# Altium PCB OSSI-1 Beacon.PcbDoc
Units mil, origin at the board's own origin, x right, y up, seen from the top; angles counter-clockwise.
Board outline 3623 x 3623 mil, 2 copper layers (Top, Bottom), stack 61.811 mil thick; 116 components, 120 nets, 377 pads, 258 vias.
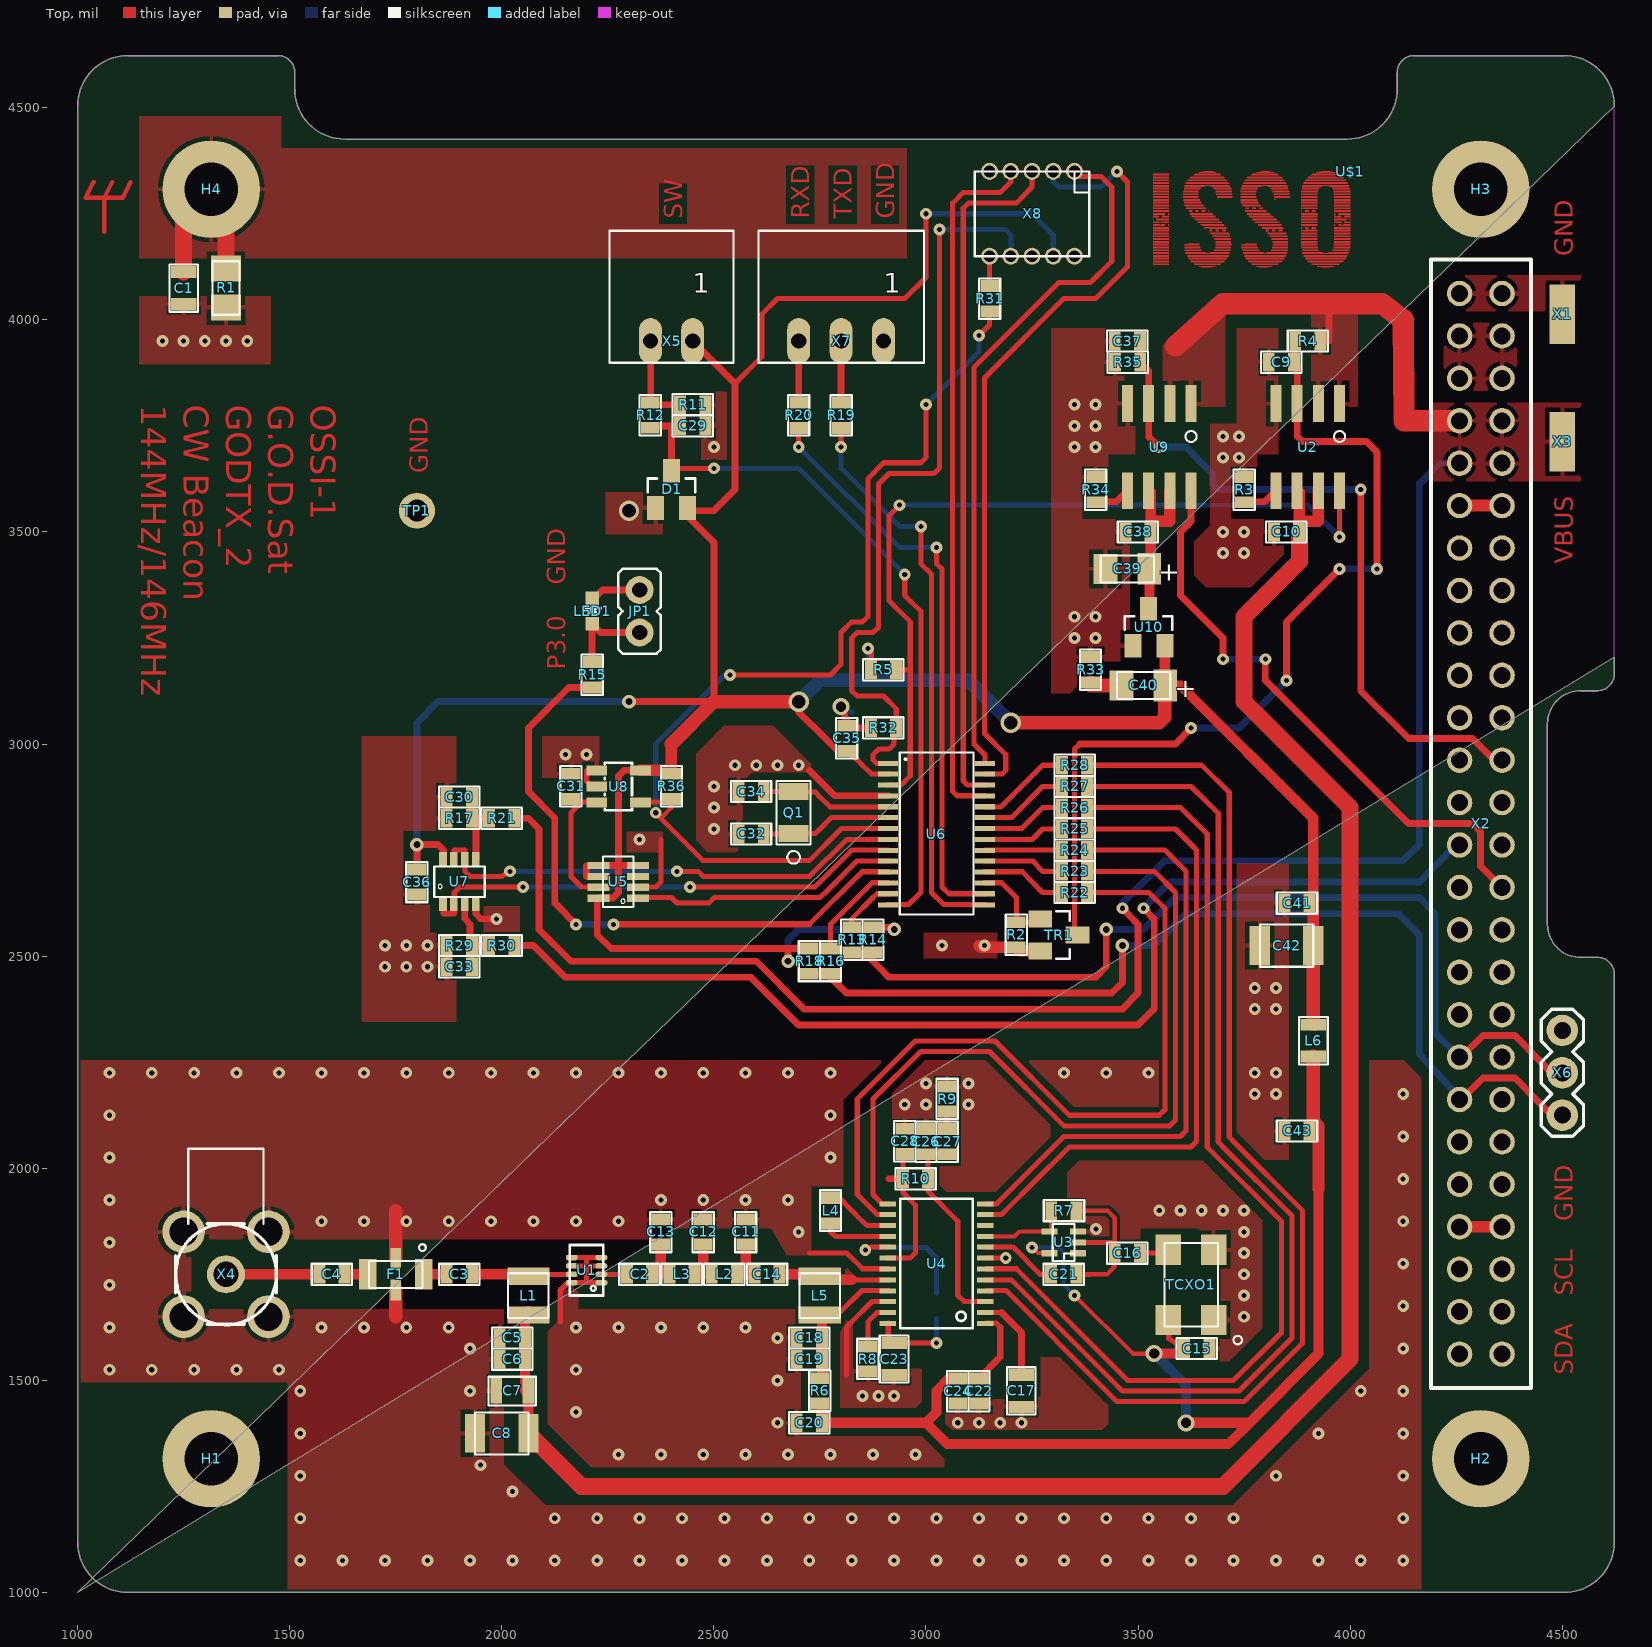
[diagram p0: Top view]
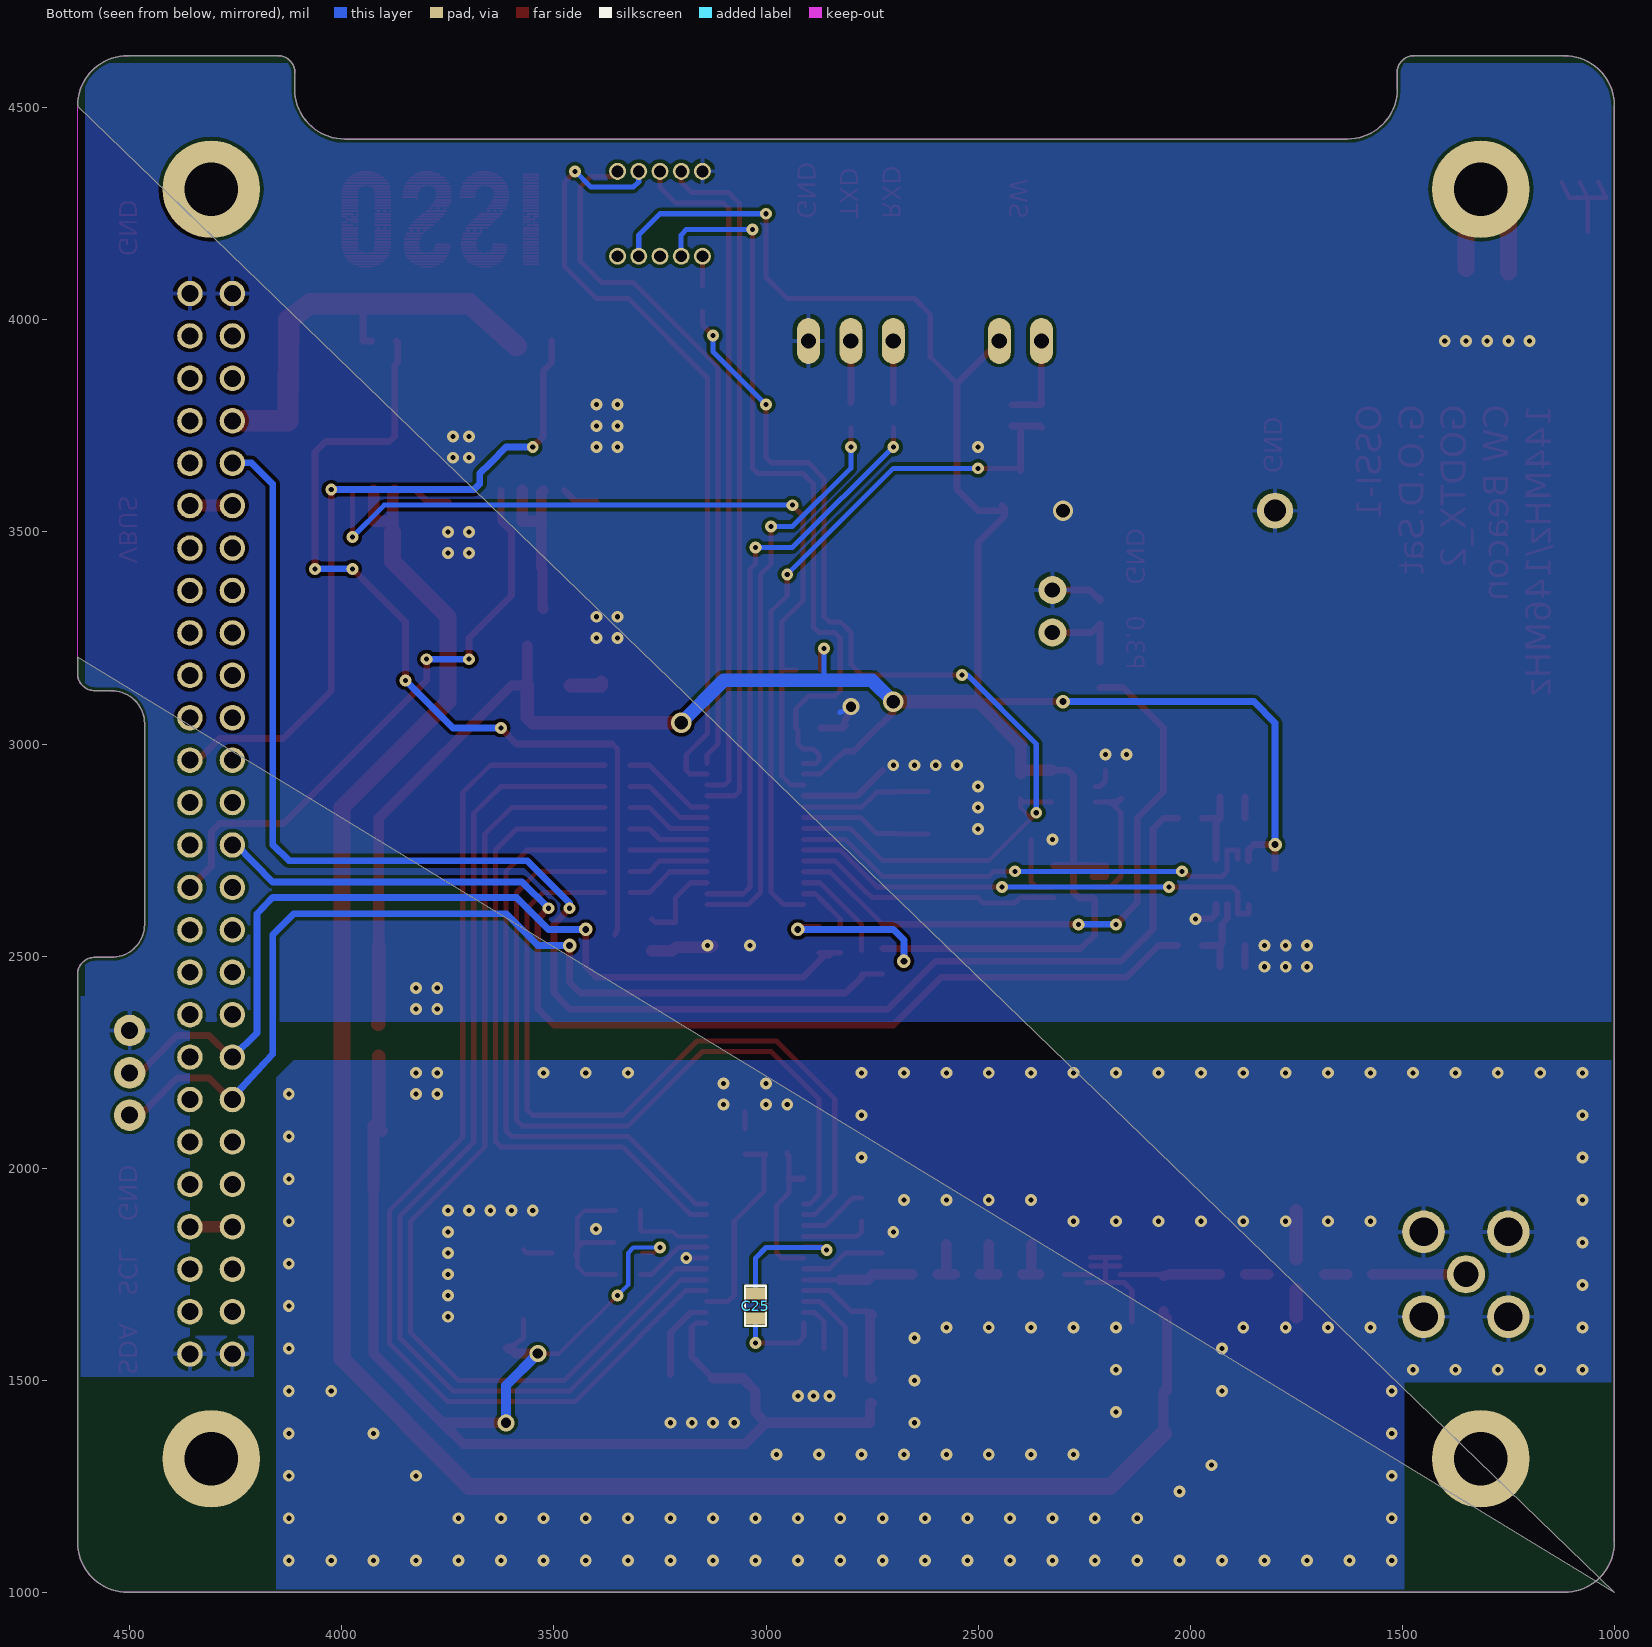
[diagram p1: Bottom view, seen from below]

## Layer stack, top to bottom
Top Solder: solder mask 0.4, Solder Resist, Dk 3.5
Top: signal copper 1.378
Dielectric 1: core 59.0551, FR-4, Dk 4.8
Bottom: signal copper 1.378
Bottom Solder: solder mask 0.4, Solder Resist, Dk 3.5

## Board outline
4623,4504 ccw(c4504,4504) 4504,4623 4150,4623 ccw(c4150.5,4583.5) 4111,4583 4111,4544 cw(c3993,4544) 3993,4426 1630,4426 cw(c1630,4544) 1512,4544 1512,4583 ccw(c1472.5,4583.5) 1473,4623 1119,4623 ccw(c1119,4504) 1000,4504 1000,1119 ccw(c1119,1119) 1119,1000 4504,1000 ccw(c4504,1119) 4623,1119 4623,2418 4623,2457 ccw(c4583,2457) 4583,2497 4544,2497 cw(c4543.5,2575.5) 4465,2575 4465,3048 cw(c4543.5,3047.5) 4544,3126 4583,3126 ccw(c4583,3166) 4623,3166 4623,3205 1000,1000

## Design rules (kind name [scope] priority, off if disabled: settings)
Clearance mdViaVia [IsVia vs IsVia] p1: gap=8
Clearance mdPadVia [IsPad vs IsVia] p2: gap=8
Clearance mdPadPad [IsPad vs IsPad] p3: gap=8
Clearance mdWireVia [(InLayerClass('Signal Layers') AND IsTrack) vs IsVia] p4: gap=8
Clearance mdWirePad [(InLayerClass('Signal Layers') AND IsTrack) vs IsPad] p5: gap=8
Clearance mdWireWire [(InLayerClass('Signal Layers') AND IsTrack) vs (InLayerClass('Signal Layers') AND IsTrack)] p6: gap=8
Clearance [All] p7: gap=8
HoleSize [All] p1: absolutevalues=TRUE maxlimit=100000 minlimit=24 maxpercent=80.000 minpercent=20.000
HoleToHoleClearance [All] p1: gap=8 allowstackedmicrovias=TRUE
PolygonConnect ThermalVias [IsVia] p1: connectstyle=Direct reliefconductorwidth=10 reliefentries=4 polygonreliefangle="90 Angle" airgapwidth=10
PolygonConnect [All] p2: connectstyle=Relief reliefconductorwidth=10 reliefentries=4 polygonreliefangle="90 Angle" airgapwidth=10
RoutingVias [All] p1: holewidth=28 width=50 viastyle="Through Hole" minholewidth=28 minwidth=50 maxholewidth=28 maxwidth=50
SilkToSilkClearance [All] p1 off: silktosilkclearance=10
SilkToSolderMaskClearance [IsPad] p1 off: minsilkscreentomaskgap=10 clearancetoexposedcopper=TRUE
SolderMaskExpansion [All] p1: expansion=4
Width [All] p1: maxlimit=100000 minlimit=10 preferedwidth=10
26 further rules are at their usual default settings.

## Components (designator, comment, footprint, x,y, rotation, side; value= is the part's Value field where it differs from the comment)
C1 "DNP" C0805(2012) 1250,4075 r270 top
C2 "10nF" C0603(1608) 2325,1750 r180 top
C3 "10nF" C0603(1608) 1900,1750 r180 top
C4 "0R" C0603(1608) 1600,1750 r180 top
C5 "10nF" C0603(1608) 2025,1600 r180 top
C6 "100nF" C0603(1608) 2025,1550 r180 top
C7 "1uF,0805" C0805(2012) 2025,1475 r180 top
C8 "22uF,1210" C1210-GCM32 2000,1375 r180 top
C9 "1uF" C0603(1608) 3838,3900 r180 top
C10 "100nF" C0603(1608) 3850,3500 r180 top
C11 "22pF" C0603(1608) 2575,1850 r270 top
C12 "39pF" C0603(1608) 2475,1850 r270 top
C13 "22pF" C0603(1608) 2375,1850 r270 top
C14 "1nF" C0603(1608) 2625,1750 r0 top
C15 "10nF" C0603(1608) 3638,1575 r0 top
C16 "1nF" C0603(1608) 3475,1800 r180 top
C17 "2.2uF, 0805" C0805(2012) 3225,1475 r90 top
C18 "100pF" C0603(1608) 2725,1600 r180 top
C19 "1uF" C0603(1608) 2725,1550 r180 top
C20 "1uF,0603 Too Small!!" C0603(1608) 2725,1400 r180 top
C21 "DNP" C0603(1608) 3325,1750 r180 top
C22 "100pF" C0603(1608) 3125,1475 r270 top
C23 "1uF 0805" C0805(2012) 2925,1550 r90 top
C24 "1uF,0603" C0603(1608) 3075,1475 r270 top
C25 "22nF" C0603(1608) 3025,1675 r90 bottom
C26 "68pF" C0603(1608) 3000,2063 r270 top
C27 "1000pF" C0603(1608) 3050,2063 r270 top
C28 "22pF" C0603(1608) 2950,2063 r90 top
C29 "100nF" C0603(1608) 2450,3750 r0 top
C30 "TBD" C0603(1608) 1900,2875 r180 top
C31 "100nF" C0603(1608) 2163,2900 r90 top
C32 "12.5pF" C0603(1608) 2588,2788 r180 top
C33 "100nF" C0603(1608) 1900,2475 r180 top
C34 "12.5pF" C0603(1608) 2588,2888 r180 top
C35 "100nF" C0603(1608) 2813,3013 r90 top
C36 "100nF" C0603(1608) 1800,2675 r270 top
C37 "1uF" C0603(1608) 3475,3950 r180 top
C38 "100nF" C0603(1608) 3500,3500 r180 top
C39 "10uF, LDO Tantal 16V" C1206(3216)-A 3475,3413 r180 top
C40 "10uF, LDO Tantal 16V" C1206(3216)-A 3513,3138 r180 top
C41 "10nF" C0603(1608) 3875,2625 r180 top
C42 "22uF,1210" C1210-GCM32 3850,2525 r180 top
C43 "100nF" C0603(1608) 3875,2088 r180 top
D1 "BAT54S" SOT23 2400,3600 r0 top
F1 "LFCN-160" LFCN 1750,1750 r180 top
H1 "" 3.2-PAD-ROUND 1315,1315 r0 top
H2 "" 3.2-PAD-ROUND 4308,1315 r0 top
H3 "" 3.2-PAD-ROUND 4308,4308 r0 top
H4 "" 3.2-PAD-ROUND 1315,4308 r0 top
JP1 "" JP1 2325,3313 r180 top
L1 "470nH, 1008 size" L1008(2520) 2063,1700 r180 top
L2 "68nH" L0603(1608) 2525,1750 r180 top
L3 "68nH" L0603(1608) 2425,1750 r180 top
L4 "8.2nH" L0603(1608) 2775,1900 r90 top
L5 "470nH, 1008 size" L1008(2520) 2750,1700 r180 top
L6 "7 R Ferrite Bead, 3A" L0805(2012) 3913,2301 r270 top
LED1 "" LED-0603 2213,3313 r0 top
Q1 "NX-3215" NX-3215 2688,2838 r90 top
R1 "DNP" WSL1206 1350,4075 r90 top
R2 "100k" R0603(1608) 3213,2550 r90 top
R3 "6.2k" R0603(1608) 3750,3600 r270 top
R4 "100k" R0603(1608) 3900,3950 r0 top
R5 "100k" R0603(1608) 2900,3175 r180 top
R6 "0" R0603(1608) 2750,1475 r90 top
R7 "1M" R0603(1608) 3325,1900 r0 top
R8 "3.6k" R0603(1608) 2863,1550 r90 top
R9 "2.4k" R0603(1608) 3050,2163 r90 top
R10 "5.1k" R0603(1608) 2975,1975 r0 top
R11 "47k" R0603(1608) 2450,3800 r0 top
R12 "4.7k" R0603(1608) 2350,3775 r90 top
R13 "250" R0603(1608) 2825,2538 r90 top
R14 "10k" R0603(1608) 2875,2538 r90 top
R15 "1k" R0603(1608) 2213,3163 r90 top
R16 "250" R0603(1608) 2775,2488 r90 top
R17 "100k" R0603(1608) 1900,2825 r180 top
R18 "10k" R0603(1608) 2725,2488 r90 top
R19 "4.7k" R0603(1608) 2800,3775 r270 top
R20 "4.7k" R0603(1608) 2700,3775 r270 top
R21 "100k" R0603(1608) 2000,2825 r180 top
R22 "4.7k" R0603(1608) 3350,2650 r0 top
R23 "4.7k" R0603(1608) 3350,2700 r0 top
R24 "4.7k" R0603(1608) 3350,2750 r0 top
R25 "4.7k" R0603(1608) 3350,2800 r0 top
R26 "4.7k" R0603(1608) 3350,2850 r0 top
R27 "4.7k" R0603(1608) 3350,2900 r0 top
R28 "4.7k" R0603(1608) 3350,2950 r0 top
R29 "DNP" R0603(1608) 1900,2525 r180 top
R30 "10k" R0603(1608) 2000,2525 r180 top
R31 "4.7k" R0603(1608) 3150,4050 r270 top
R32 "100k" R0603(1608) 2900,3038 r180 top
R33 "0" R0603(1608) 3388,3175 r90 top
R34 "23.7k" R0603(1608) 3400,3600 r270 top
R35 "100k" R0603(1608) 3475,3900 r0 top
R36 "100k" R0603(1608) 2400,2900 r90 top
TCXO1 "19.2MHz" TCXO_M532 3625,1725 r90 top
TP1 "TP" TP-13 1800,3550 r0 top
TR1 "FDV301N" SOT23 3313,2550 r270 top
U1 "ADL5530" LFCSP8_CP 2200,1760 r180 top
U2 "MAX890L" SO8 3900,3700 r180 top
U3 "NC7SZ04" SC70-5 3325,1825 r90 top
U4 "ADF7012" TSSOP24 3025,1775 r90 top
U5 "MAX6369" SOT23-8 2275,2675 r90 top
U6 "MSP430F2132" PW28 3025,2788 r270 top
U7 "OPA2347" SOT23-8DCN 1900,2675 r0 top
U8 "TPS3838" SOT23-5DBV 2275,2900 r270 top
U9 "MAX890L" SO8 3550,3700 r180 top
U10 "MCP1700_SOT23" SOT23 3525,3275 r0 top
U$1 "" OSSILOGORECT1005 4000,4350 r180 top
X1 "P-PAD-S" P-PAD-S 4500,4013 r90 top
X2 "ESQ-126-38-G-D" ESQ-126-XX-X-D 4308,2812 r0 top
X3 "P-PAD-S" P-PAD-S 4500,3713 r90 top
X4 "RFCON-MCX-R/A" MCX-R/A 1350,1750 r90 top
X5 "5268-02" 5628-02 2400,3950 r0 top
X6 "" 1X03 4500,2125 r90 top
X7 "5268-03" 5268-03 2800,3950 r0 top
X8 "JTAG10PINMINI-H" M50-3200545 3250,4250 r180 top

## Footprints (in the part's own frame and the unit in brackets; to place one, negate y for a bottom-side part, rotate by r counter-clockwise, add the part's x,y. Pads: shape width x height; smd on the part's side, far side on the other; paste and mask are expansions set on the pad)
1X03 [mil] "1X03"
  round 74 hole 40: 1(0,0) 2(100,0) 3(200,0)
  silkscreen extent -50,-50 250,50
3.2-PAD-ROUND [mil] "3.2-PAD-ROUND"
  round 230 hole 126: B3,2(0,0)
5268-03 [mil] "5268-03"
  oval 54x108 hole 36: 1(100,0) 2(0,0) 3(-100,0)
  silkscreen extent -195,-51 195,260
5628-02 [mil] "5628-02"
  oval 54x108 hole 36: 1(50,0) 2(-49.21,0)
  silkscreen extent -146,-51 146,260
C0603(1608) [mil] "C0603(1608)"
  rect 28x44 smd: 1(-29.53,0) 2(30,0)
  silkscreen extent -47,-25 48,25
C0805(2012) [mil] "C0805(2012)"
  rect 28x60 smd: 1(-37.4,0) 2(38,0)
  silkscreen extent -55,-33 56,34
C1206(3216)-A [mil] "C1206(3216)-A"
  rect 56x75 smd: 1(-51.18,0)
  rect 56x71 smd: 2(52,0)
  silkscreen extent -63,-31 63,32
C1210-GCM32 [mil] "C1210-GCM32"
  rect 48x91 smd: P$1(-62.99,0) P$2(63,0)
  silkscreen extent -63,-49 63,50
ESQ-126-XX-X-D [mil] "ESQ-126-XX-X-D"
  round 60 hole 40: 1(-50,1250) 2(50,1250) 3(-50,1150) 4(50,1150) 5(-50,1050) 6(50,1050) 7(-50,950) 8(50,950) 9(-50,850) 10(50,850) 11(-50,750) 12(50,750) 13(-50,650) 14(50,650) 15(-50,550) 16(50,550) 17(-50,450) 18(50,450) 19(-50,350) 20(50,350) 21(-50,250) 22(50,250) 23(-50,150) 24(50,150) 25(-50,50) 26(50,50) 27(-50,-50) 28(50,-50) 29(-50,-150) 30(50,-150) 31(-50,-250) 32(50,-250) 33(-50,-350) 34(50,-350) 35(-50,-450) 36(50,-450) 37(-50,-550) 38(50,-550) 39(-50,-650) 40(50,-650) 41(-50,-750) 42(50,-750) 43(-50,-850) 44(50,-850) 45(-50,-950) 46(50,-950) 47(-50,-1050) 48(50,-1050) 49(-50,-1150) 50(50,-1150) 51(-50,-1250) 52(50,-1250)
  silkscreen extent -117,-1330 118,1330
JP1 [mil] "JP1"
  round 66 hole 36: 1(0,-50) 2(0,50)
  silkscreen extent -50,-100 50,100
L0603(1608) [mil] "L0603(1608)"
  rect 28x44 smd: 1(-29.53,0) 2(30,0)
  silkscreen extent -47,-25 48,25
L0805(2012) [mil] "L0805(2012)"
  rect 28x60 smd: 1(-37.4,0) 2(38,0)
  silkscreen extent -55,-33 56,34
L1008(2520) [mil] "L1008(2520)"
  rect 100x41 smd: P$1(0,46) P$2(0,-45.08)
  silkscreen extent -47,-53 48,53
LED-0603 [mil] "LED-0603"
  rect 32x32 smd: A(0,-29.53) C(0,30)
  silkscreen extent -18,-6 19,7
LFCN [mil] "LFCN"
  rect 42x71 smd: 1(-65.94,0) 3(66,0)
  rect 25x50 smd: 2(0,-36.42) 4(0,37)
  silkscreen extent -71,-71 63,32
LFCSP8_CP [mil] "LFCSP8_CP"
  rrect85% 28x13 smd: 1(-34.84,30) 2(-34.84,10) 3(-34.84,-9.84) 4(-34.84,-29.53) 5(35,-29.53) 6(35,-9.84) 7(35,10) 8(35,30)
  silkscreen extent -39,-59 40,60
M50-3200545 [mil] "M50-3200545"
  round 40 hole 28: 1(-100,-100) 2(-100,100) 3(-50,-100) 4(-50,100) 5(0,-100) 6(0,100) 7(50,-100) 8(50,100) 9(100,-100) 10(100,100)
  silkscreen extent -135,-100 135,100
MCX-R/A [mil] "MCX-R/A"
  round 90 hole 60: 1(0,0)
  round 100.5 hole 67: 2(-100,100) 3(100,100) 4(100,-100) 5(-100,-100)
  silkscreen extent -119,-119 296,119
NX-3215 [mil] "NX-3215"
  rect 40x71 smd: 1(-49.21,0) 2(50,0)
  silkscreen extent -120,-39 75,40
OSSILOGORECT1005 [mil] "OSSILOGORECT1005"
  Top drawing of 1356 lines, arcs and shapes, not listed
P-PAD-S [mil] "P-PAD-S"
  rect 140x60 smd: 1(0,0)
PW28 [mil] "PW28"
  rect 12x48 smd: 1(-166.5,-114.49) 2(-140.91,-114.49) 3(-115.32,-114.49) 4(-89.73,-114.49) 5(-64.14,-114.49) 6(-38.55,-114.49) 7(-12.96,-114.49) 8(13,-114.49) 9(39,-114.49) 10(64,-114.49) 11(90,-114.49) 12(116,-114.49) 13(141,-114.49) 14(167,-114.49) 15(167,114) 16(141,114) 17(116,114) 18(90,114) 19(64,114) 20(39,114) 21(13,114) 22(-12.96,114) 23(-38.55,114) 24(-64.14,114) 25(-89.73,114) 26(-115.32,114) 27(-140.91,114) 28(-166.5,114)
  silkscreen extent -192,-87 190,87
R0603(1608) [mil] "R0603(1608)"
  rect 28x44 smd: 1(-29.53,0) 2(30,0)
  silkscreen extent -47,-25 48,25
SC70-5 [mil] "SC70-5"
  rect 15x38 smd: 1(-25.59,-33.46) 2(0,-33.46) 3(26,-33.46) 4(26,34) 5(-25.59,34)
  silkscreen extent -43,-26 44,26
SO8 [mil] "SO8"
  rect 26x87 smd: 1(-75,-102.36) 2(-25,-102.36) 3(25,-102.36) 4(75,-102.36) 5(75,103) 6(25,103) 7(-25,103) 8(-75,103)
  silkscreen extent -88,-38 -62,-12
SOT23 [mil] "SOT23"
  rect 40x56 smd: 1(-37.4,-43.31) 2(38,-43.31) 3(0,44)
  silkscreen extent -56,-6 56,26
SOT23-5DBV [mil] "SOT23-5DBV"
  rect 24x49 smd: 1(-37.4,-51.18) 2(0,-51.18) 3(38,-51.18) 4(38,52) 5(-37.4,52)
  silkscreen extent -56,-32 56,32
SOT23-8 [mil] "SOT23-8"
  rect 17x52 smd: 1(-38.39,-46.26) 2(-12.8,-46.26) 3(13,-46.26) 4(39,-46.26) 5(39,47) 6(13,47) 7(-12.8,47) 8(-38.39,47)
  silkscreen extent -59,-35 60,36
SOT23-8DCN [mil] "SOT23-8DCN"
  rect 18x32 smd: 1(-38.39,-53.15) 2(-12.8,-53.15) 3(13,-53.15) 4(39,-53.15) 5(39,54) 6(13,54) 7(-12.8,54) 8(-38.39,54)
  silkscreen extent -59,-35 60,36
TCXO_M532 [mil] "TCXO_M532"
  rect 71x60 smd: 1(-82.68,-53.15) 2(83,-53.15) 3(83,54) 4(-82.68,54)
  silkscreen extent -140,-120 99,63
TP-13 [mil] "TP-13"
  round 85 hole 52: TP(0,0)
TSSOP24 [mil] "TSSOP24"
  rect 12x39 smd: 1(-140.75,-114.87) 2(-115.16,-114.87) 3(-89.57,-114.87) 4(-63.98,-114.87) 5(-38.39,-114.87) 6(-12.8,-114.87) 7(13,-114.87) 8(39,-114.87) 9(64,-114.87) 10(90,-114.87) 11(116,-114.87) 12(141,-114.87) 13(141,115) 14(116,115) 15(90,115) 16(64,115) 17(39,115) 18(13,115) 19(-12.8,115) 20(-38.39,115) 21(-63.98,115) 22(-89.57,115) 23(-115.16,115) 24(-140.75,115)
  silkscreen extent -153,-86 153,86
WSL1206 [mil] "WSL1206"
  rect 62x71 smd: P$1(-45.87,0) P$2(46,0)
  silkscreen extent -63,-31 63,32

## Part data
C1 C7 C17 C23: library part C0805(2012)
C2 C3 C4 C5 C6 C9 C10 C11 C12 C13 C14 C15 C16 C18 C19 C20 C21 C22 C24 C25 C26 C27 C28 C29 C30 C31 C32 C33 C34 C35 C36 C37 C38 C41 C43: library part C0603(1608)
C8 C42: library part C1210-GCM32
C39 C40: library part C1206(3216)-A
D1 TR1 U10: library part SOT23
F1: library part LFCN
H1 H2 H3 H4: library part 3.2-PAD-ROUND
JP1: library part JP1
L1 L5: library part L1008(2520)
L2 L3 L4: library part L0603(1608)
L6: library part L0805(2012)
LED1: library part LED-0603
R1: library part WSL1206
R2 R3 R4 R5 R6 R7 R8 R9 R10 R11 R12 R13 R14 R15 R16 R17 R18 R19 R20 R21 R22 R23 R24 R25 R26 R27 R28 R29 R30 R31 R32 R33 R34 R35 R36: library part R0603(1608)
TCXO1: library part TCXO_M532
TP1: library part TP-13
U1: library part LFCSP8_CP
U2 U9: library part SO8
U3: library part SC70-5
U4: library part TSSOP24
U5: library part SOT23-8
U6: library part PW28
U7: library part SOT23-8DCN
U8: library part SOT23-5DBV
U$1: library part OSSILOGORECT1005
X2: library part ESQ-126-XX-X-D
X4: library part MCX-R/A
X5: library part 5628-02
X6: library part 1X03
X8: library part M50-3200545

## Via types
v1: diameter 28/28 (per signal layer), hole 12, Top to Bottom, 246 vias
v2: diameter 32/32 (per signal layer), hole 16, Top to Bottom, 6 vias
v3: diameter 40/40 (per signal layer), hole 24, Top to Bottom, 3 vias
v4: diameter 48/48 (per signal layer), hole 32, Top to Bottom, 3 vias

## Nets (pads, with @x,y where several pads share a name; then routed paths per layer and width w, separated by ;. In a path a pad name is that pad's centre, name@x,y a point inside that pad or via, vN(x,y) a via of type N, cw(c..) or ccw(c..) an arc to the next point about the centre after c; other vN are vias at no path point)
3.3VBEACON: C35.1 C36.1 C40.1 C41.1 C42.P$1 D1.2 L6.1 R5.2 R14.2 R18.2 R36.2 U5.4 U5.5 U5.6 U5.8 U6.2 U7.8 U8.5 U10.2 X5.1 X8.4 | length 7887.9
  Top w10: C41.1@3905,2625 C41.1@3913,2625
  Top w12: 2550,3850 2613,3913 2613,4013 2650,4050 2950,4050 3000,4100 v1(3000,4250) ; C35.1@2813,2983 2838,2963 2850,2950 2872,2929 U6.2@2911,2929 ; v1(2863,3225) 2871,3218 R5.2@2871,3175
  Top w16: C36.1@1800,2705 v2@1800,2750 ; v2(1800,2763) v2@1800,2750 ; U7.8@1862,2729 1863,2728 1863,2725 1863,2750 1850,2763 1813,2763 v2@1800,2750 ; U5.6@2229,2688 2201,2688 2200,2688 2200,2713 2228,2713 2229,2714 2275,2714 ; v2(2300,3100) 2500,3100 2500,3475 2438,3538 D1.2@2438,3557 ; U5.4@2322,2714 2276,2714 2275,2713 ; U8.5@2327,2938 2288,2938 2275,2925 2275,2715 2275,2714 ; D1.2@2444,3563 D1.2@2438,3557 ; X5.1 2550,3850 2550,3700 2550,3600 2500,3550 2450,3550 2445,3550 D1.2@2438,3557 ; v2(2675,2488) 2675,2518 ; v4(2700,3100) 2700,3075 2763,3013 2793,2983 C35.1@2813,2983 ; R18.2 2675,2518 ; R14.2 2921,2568 v2(2925,2563) ; 2275,2713 2275,2650 2263,2638 2262,2637 2229,2637 2225,2633 2225,2550 2258,2518 2675,2518 ; 2275,2713 2275,2714
  Top w24: U10.2@3563,3232 3563,3139 3564,3138 3600,3138 3913,2825 C41.1@3913,2638 ; C41.1@3913,2638 3913,2625 C41.1@3913,2638
  Top w27: U8.5@2327,2938 2393,2938 R36.2 2400,3000
  Top w28: C42.P$1 3913,2551 3913,2625 C41.1@3913,2638
  Top w32: 2400,3000 2500,3100 v4(2700,3100) ; v4(3200,3050) 3450,3050 3550,3050 3563,3063 C40.1@3563,3139 ; L6.1@3913,2339 3915,2340 3913,2342 C42.P$1
  Bottom w12: 2863,3150 v1(2863,3225) ; v1(3000,4250) 3250,4250 3300,4200 X8.4
  Bottom w16: v2(1800,2763) 1800,3050 1850,3100 v2(2300,3100) ; v2(2675,2488) 2675,2538 2700,2563 v2(2925,2563)
  Bottom w32: v4(2700,3100) 2750,3150 2863,3150 3100,3150 v4(3200,3050)
3.3VOBC: X2.45 X2.46 | length 100.8
  Top w28: X2.45 4262,1862 4263,1863 4264,1862 X2.46
ADC0: U6.8 U7.6 U7.7 | length 1143.2
  Top w12: U7.7@1888,2729 1888,2750 1913,2750 U7.6 1913,2726 1913,2725 1913,2700 1925,2688 2000,2688 v1(2019,2700) ; v1(2413,2700) 2463,2700 2475,2688 2725,2688 2813,2775 U6.8@2911,2775
  Bottom w12: v1(2019,2700) v1(2413,2700)
ADC1: U6.9 U7.1 U7.2 | length 1162.1
  Top w12: U7.1@1862,2622 1862,2601 1863,2600 1888,2600 1888,2622 1888,2623 1888,2650 1900,2663 v1(2050,2663) ; v1(2444,2663) 2738,2663 2825,2750 U6.9@2911,2750
  Bottom w12: v1(2050,2663) v1(2444,2663)
ANT_DEPLOY1: X2.19
ANT_DEPLOY2: X2.20
BAT_-CHRG: X2.42
BAT_-FAULT: X2.44
BAT_-ON: X2.38
BAT_TEMP: X2.47
BEACON_-FAULT: U9.8 X2.30 | length 1407.4
  Top w16: U9.8@3625,3598 3625,3525 3600,3500 3600,3350 3700,3250 v1(3700,3200) ; v1(3800,3200) 3800,3150 4138,2813 4250,2813 4288,2813 4307,2794 4307,2712 X2.30
  Bottom w16: v1(3700,3200) v1(3800,3200)
BEACON_CE: R22.2 U4.14 | length 1850.1
  Top w12: U4.14@2911,1891 2885,1891 2838,1938 2838,2163 2975,2300 3163,2300 3338,2125 3550,2125 3561,2136 3563,2138 3563,2613 3525,2650 3400,2650 R22.2
BEACON_CWCONTROL: R11.1 R12.2 X5.2 | length 221.4
  Top w16: X5.2@2351,3950 2351,3806 R12.2 2350,3800 R11.1@2421,3800
BEACON_DATA: R28.2 U4.4 | length 2644.6
  Top w12: U4.4@3140,1712 3189,1712 3425,1475 3450,1450 3750,1450 3888,1588 3888,1900 3725,2063 3715,2074 3715,2686 3715,2886 3650,2950 R28.2
BEACON_MUXOUT: R26.2 U4.6 | length 2409.9
  Top w12: U4.6@3140,1763 3213,1763 3475,1500 3725,1500 3838,1613 3838,1875 3675,2038 3663,2050 3663,2663 3663,2788 3600,2850 R26.2
BEACON_OFF: C37.1 R35.2 U9.3 X2.24 | length 1674.9
  Top w16: C37.1@3505,3950 R35.2 3525,3880 3525,3803 3525,3725 v1(3550,3700) ; v1(4025,3600) 4025,3125 4138,3013 4288,3013 4339,2962 X2.24
  Bottom w16: v1(3550,3700) 3613,3700 3650,3663 3675,3638 3675,3613 3688,3600 v1(4025,3600)
BEACON_RFOUT: C2.1 C13.2 L3.2 | length 112
  Top w24: C2.1@2355,1750 2375,1750 ; C13.2@2375,1821 2375,1750 ; L3.2@2396,1750 2375,1750
BEACON_SCL: R13.1 R14.1 X2.37 X6.2 | length 2257
  Top w12: R14.1@2863,2500 2850,2500 2843,2508 2825,2508 R14.1@2875,2508
  Top w16: R14.1@2863,2500 2888,2475 2913,2450 3400,2450 3425,2475 v2(3425,2563) ; X2.37 4259,2263 4263,2263 4313,2313 4363,2313 4388,2313 4450,2250 4475,2225 X6.2
  Bottom w16: v2(3425,2563) 3513,2563 3588,2638 4163,2638 4200,2600 4200,2319 X2.37
BEACON_SCLK: R25.2 U4.11 | length 1543.1
  Top w12: U4.11@3140,1891 3178,1891 3200,1913 3250,1963 3338,2050 3625,2050 3632,2057 ; R25.2 3588,2800 3638,2750 3638,2650 3638,2063 ; 3632,2057 3638,2063 ; 3632,2057 3638,2063
BEACON_SDA: R16.1 R18.1 X2.39 X6.1 | length 2335.8
  Top w12: R18.1@2725,2458 2775,2458 R16.1@2775,2450
  Top w16: R16.1@2775,2450 2813,2413 3438,2413 3463,2438 v2(3463,2525) ; X2.39 4262,2162 4313,2213 4388,2213 4450,2150 4475,2125 X6.1
  Bottom w16: v2(3463,2525) 3538,2525 3613,2600 4113,2600 4163,2550 4163,2475 4163,2269 4250,2175 4250,2169 X2.39
BEACON_SDATA: R24.2 U4.12 | length 1410
  Top w12: U4.12@3140,1916 3166,1916 3175,1925 3325,2075 3600,2075 3612,2087 3613,2088 3613,2575 3613,2700 3563,2750 R24.2
BEACON_SLE: R23.2 U4.13 | length 1872.8
  Top w12: U4.13@2911,1916 2897,1916 2875,1938 2875,2163 2988,2275 3150,2275 3325,2100 3575,2100 3587,2112 3588,2113 3588,2650 3538,2700 R23.2
BEACON_TXCLK: R27.2 U4.5 | length 2527.2
  Top w12: U4.5@3140,1737 3201,1737 3438,1500 3463,1475 3738,1475 3863,1600 3863,1888 3700,2050 3689,2062 3689,2674 3689,2837 3625,2900 R27.2
BEACON_WDT_RST: C31.1 U5.7 U8.3 | length 326
  Top w12: U8.3@2224,2863 2188,2863 2163,2838 2163,2688 2188,2663 U5.7@2229,2663
  Top w16: C31.1@2163,2871 2171,2863 2188,2863
BUS_CS: R30.1 X2.27 | length 2656.5
  Top w16: R30.1@2030,2525 2075,2525 2150,2450 2588,2450 2700,2338 3500,2338 3538,2375 3538,2588 v1(3513,2613)
  Bottom w16: v1(3513,2613) 3575,2675 4163,2675 4250,2763 4252,2762 X2.27
COMMS_-FAULT: X2.32
COMMS_OFF: X2.25
COMMS_SCL: X2.41
COMMS_SDA: X2.43
GND: C1.2 C5.2 C6.2 C7.2 C8.P$2 C9.2 C10.2 C11.1 C12.1 C13.1 C15.2 C17.1 C18.2 C19.2 C20.2 C22.2 C23.1 C24.2 C26.1 C28.2 C29.2 C30.2 C31.2 C32.2 C33.2 C34.2 C35.2 C36.2 C37.2 C38.2 C39.2 C41.2 C42.P$2 C43.2 D1.1 F1.2 F1.4 JP1.1 LED1.C R1.P$1 R2.1 R3.1 R8.1 R9.2 R11.2 R17.2 R29.2 R32.2 R33.2 R34.1 R35.1 TCXO1.1 TCXO1.2 TP1.TP TR1.2 U1.1 U1.3 U1.4 U1.5 U1.6 U1.8 U2.4 U3.3 U4.7 U4.19 U4.22 U5.2 U6.4 U7.4 U8.1 U8.2 U9.4 U10.1 X1.1 X2.1 X2.2 X2.51 X2.52 X4.2 X4.3 X4.4 X4.5 X6.3 X7.1 X8.9 | length 2146.4
  Top w12: 2138,1638 2138,1713 2150,1725 ; U1.8@2166,1731 U1.8@2156,1731 ; U1.6@2166,1770 2200,1770 ; U1.5@2166,1790 2200,1790 ; U8.1@2200,2938 2200,2913 2213,2900 U8.2@2224,2900 ; U1.3@2235,1770 2200,1770 ; U1.1@2245,1731 U1.1@2231,1731 ; U5.2@2322,2663 2363,2663 2375,2675 2375,2775 ; 2725,1800 2813,1800 2851,1763 U4.19@2911,1763 ; 2813,1513 2813,1625 2825,1638 2873,1686 U4.22@2911,1686 ; C35.2 C35.2@2818,3038 ; U4.7@3140,1788 3175,1788 v1(3188,1788) ; 2150,1725 U1.8@2156,1731 ; 2150,1725 U1.8@2156,1731 ; U1.8@2156,1731 2200,1731 ; 2200,1731 U1.1@2231,1731 ; 2200,1731 2200,1738 2200,1770 ; 2200,1770 2200,1788 ; 2200,1770 2200,1788 ; 2200,1788 2200,1790 ; 2200,1788 2202,1790 2235,1790 2200,1790 ; U1.1@2231,1731 2235,1731 U1.1@2231,1731
  Top w16: C33.2@1871,2475 R29.2@1871,2525 ; R17.2@1871,2825 C30.2@1871,2875 ; U7.4@1939,2622 1939,2600 1950,2588 v1(1988,2588) ; LED1.C 2213,3338 2238,3363 JP1.1 ; 2725,2938 2786,2878 U6.4@2911,2878 ; v3(2800,3088) 2818,3043 C35.2 ; C35.2@2818,3038 R32.2@2871,3038
  Top w27: v1@3125,2525 3130,2521 3213,2521 3221,2513 TR1.2@3270,2513
  Top w32: 1750,1650 F1.4@1750,1714 ; F1.2@1750,1787 1750,1900
  Bottom w12: v3(2800,3088) 2825,3075
  other v1: 1525,1075 1625,1075 1725,1075 1825,1075 1925,1075 2025,1075 2125,1075 2225,1075 2325,1075 2425,1075 2525,1075 2625,1075 2725,1075 2825,1075 2925,1075 3025,1075 3125,1075 3225,1075 3325,1075 3425,1075 3525,1075 3625,1075 3725,1075 3825,1075 3925,1075 4025,1075 4125,1075 1525,1175 2125,1175 2225,1175 2325,1175 2425,1175 2525,1175 2625,1175 2725,1175 2825,1175 2925,1175 3025,1175 3125,1175 3225,1175 3325,1175 3425,1175 3525,1175 3625,1175 3725,1175 4125,1175 2025,1238 1525,1275 3825,1275 4125,1275 1950,1300 2275,1325 2375,1325 2475,1325 2575,1325 2675,1325 2775,1325 2875,1325 2975,1325 1525,1375 3925,1375 4125,1375 2650,1400 3075,1400 3125,1400 3175,1400 3225,1400 2175,1425 2850,1463 2888,1463 2925,1463 1525,1475 1925,1475 4025,1475 4125,1475 2650,1500 1075,1525 1175,1525 1275,1525 1375,1525 1475,1525 2175,1525 1925,1575 4125,1575 2650,1600 1075,1625 1575,1625 1675,1625 1775,1625 1875,1625 2175,1625 2275,1625 2375,1625 2475,1625 2575,1625 3750,1650 4125,1675 3750,1700 1075,1725 3750,1750 4125,1775 3750,1800 1075,1825 2700,1850 3750,1850 3401,1857 1575,1875 1675,1875 1775,1875 1875,1875 1975,1875 2075,1875 2175,1875 2275,1875 4125,1875 3550,1900 3600,1900 3650,1900 3700,1900 3750,1900 1075,1925 2375,1925 2475,1925 2575,1925 2675,1925 4125,1975 1075,2025 2775,2025 4125,2075 1075,2125 2775,2125 2950,2150 3000,2150 3100,2150 3775,2175 3825,2175 4125,2175 3000,2200 3100,2200 1075,2225 1175,2225 1275,2225 1375,2225 1475,2225 1575,2225 1675,2225 1775,2225 1875,2225 1975,2225 2075,2225 2175,2225 2275,2225 2375,2225 2475,2225 2575,2225 2675,2225 2775,2225 3325,2225 3425,2225 3525,2225 3775,2225 3825,2225 3775,2375 3825,2375 3775,2425 3825,2425 1725,2475 1775,2475 1825,2475 1725,2525 1775,2525 1825,2525 3038,2525 3138,2525 2325,2775 2500,2800 2500,2850 2500,2900 2550,2950 2600,2950 2650,2950 2700,2950 2150,2975 2200,2975 3350,3250 3400,3250 3350,3300 3400,3300 3700,3450 3750,3450 3700,3500 3750,3500 3700,3675 3738,3675 2500,3700 3350,3700 3400,3700 3700,3725 3738,3725 3350,3750 3400,3750 3350,3800 3400,3800 1200,3950 1250,3950 1300,3950 1350,3950 1400,3950
  other v4: 2300,3550
LED_-FAULT: X2.28
LED_OFF: X2.23
LED_SCL: X2.33
LED_SDA: X2.35
N$1: R15.1 U6.11 | length 1485.8
  Top w12: 2725,2575 2849,2699 U6.11@2911,2699
  Top w16: v1(2175,2575) 2125,2625 2125,2825 2063,2888 2063,3038 2158,3133 R15.1@2213,3133 ; v1(2263,2575) 2725,2575
  Bottom w16: v1(2175,2575) v1(2263,2575)
N$2: U6.27 X8.3 | length 3938.3
  Top w12: U6.27@3139,2929 3179,2929 3188,2938 3188,2975 3138,3025 ; v1(3450,4350) 3475,4325 3475,4125 3400,4050 3325,4050 3138,3863 3138,3713 ; 3138,3025 3138,3713 ; 3138,3025 3138,3713 ; 3138,3025 3138,3713 ; 3138,3025 3138,3713
  Bottom w12: X8.3 3300,4325 3313,4313 3413,4313 v1(3450,4350)
N$3: U6.26 X8.5 | length 1625.2
  Top w12: U6.26@3139,2903 3098,2903 3088,2913 3088,3713 3088,4263 3100,4275 3213,4275 3250,4313 X8.5
N$4: U6.25 X8.7 | length 1649.9
  Top w12: U6.25@3139,2878 3073,2878 3063,2888 3063,3713 3063,4275 3088,4300 3175,4300 3200,4325 X8.7
N$5: C34.1 Q1.2 U6.5 | length 307.9
  Top w12: C34.1@2618,2888 2687,2888 2688,2887 2739,2887 2750,2875 2774,2852 U6.5@2911,2852
N$6: C32.1 Q1.1 U6.6 | length 309.2
  Top w12: C32.1@2618,2788 2687,2788 2688,2789 2739,2789 2750,2800 2777,2827 U6.6@2911,2827
N$7: JP1.2 LED1.A R15.2 | length 210.3
  Top w16: R15.2 2213,3283 2233,3263 JP1.2
N$8: U6.28 X8.1 | length 1651.4
  Top w12: U6.28@3139,2954 3139,2974 3113,3000 3113,3713 3113,3888 3175,3950 3313,4088 3388,4088 3438,4138 3438,4313 3413,4338 3363,4338 X8.1
N$9: R16.2 U6.12 | length 243.6
  Top w12: U6.12@2911,2673 2873,2673 2775,2575 R16.2 ; R16.2 2775,2513 R16.2
N$10: R13.2 U6.13 | length 130.2
  Top w12: R13.2 2825,2588 2875,2638 2885,2647 U6.13@2911,2647
N$11: R20.2 U6.16 | length 1382.2
  Top w12: v1(2700,3700) R20.2@2700,3746 ; v1(3025,3463) 3025,3425 3038,3413 3038,2663 3054,2647 U6.16
  Bottom w12: v1(2700,3700) 2938,3463 v1(3025,3463)
N$12: U5.1 U6.10 | length 635.8
  Top w12: U5.1@2322,2637 2323,2638 2400,2638 2413,2625 2488,2625 2500,2638 2750,2638 2763,2650 2837,2724 U6.10@2911,2724
N$13: C29.1 D1.3 R12.1 U6.14 | length 1686.3
  Top w12: D1.3@2400,3650 v1(2500,3650) ; U6.14@2911,2622 2959,2622 2988,2650 2988,3313 2950,3350 v1(2950,3400)
  Top w16: R12.1@2350,3746 2355,3750 2400,3750 ; D1.3 2400,3650 2400,3750 ; C29.1@2421,3750 2400,3750
  Bottom w12: v1(2500,3650) 2700,3650 v1(2950,3400)
N$14: L4.1 U4.16 | length 169.3
  Top w12: U4.16@2911,1839 2787,1839 2775,1850 L4.1@2775,1871 ; L4.1@2775,1871 2775,1875 L4.1@2775,1871
N$15: L4.2 U4.15 | length 162.9
  Top w12: L4.2 2796,1930 2850,1875 2861,1865 U4.15@2911,1865
N$16: C23.2 C25.1 U4.24 | length 210.5
  Top w12: U4.24@2911,1635 2911,1603 C23.2 2926,1588 v1(3025,1588)
  Bottom w12: v1(3025,1588) C25.1@3025,1646
N$17: C25.2 U4.17 | length 318.7
  Top w12: v1(2857,1807) 2870,1814 U4.17@2911,1814
  Bottom w12: v1(2857,1807) 2868,1813 2880,1813 3000,1813 3025,1788 C25.2
N$18: R8.2 U4.23 | length 125.1
  Top w12: U4.23@2911,1660 2885,1660 2863,1638 R8.2 ; R8.2 2863,1575 R8.2
N$19: C9.1 R4.1 TR1.3 U2.3 | length 2116.4
  Top w12: TR1.3@3356,2550 3350,2563 3350,2588 3350,2988 3363,3000
  Top w16: 3363,3000 3588,3000 v1(3625,3038) ; v1(3850,3150) 3850,3288 v1(3975,3413) ; R4.1@3871,3950 3868,3947 3868,3900 3875,3893 3875,3803 3875,3725 3888,3713 4038,3713 4063,3688 v1(4063,3413)
  Bottom w16: v1(3625,3038) 3738,3038 v1(3850,3150) ; v1(3975,3413) v1(4063,3413)
N$20: C27.1 R9.1 | length 40
  Top w12: C27.1@3050,2093 R9.1@3050,2133
N$21: R3.2 U2.5 | length 86.2
  Top w16: R3.2@3750,3571 3798,3571 U2.5@3825,3598
N$22: C30.1 R17.1 R21.2 U7.5 | length 191
  Top w16: C30.1@1930,2875 R17.1@1930,2825 ; U7.5 1939,2817 R17.1@1930,2825 ; R21.2@1971,2825 R17.1@1930,2825
N$23: C14.2 L5.P$2 U4.20 | length 263.7
  Top w12: 2825,1737 U4.20@2911,1737
  Top w24: C14.2 2750,1750 2750,1746 2759,1737 2825,1737
N$24: C28.1 R10.1 U4.18 | length 383.6
  Top w10: C28.1@2946,2029 2947,2016 C28.1@2950,2038
  Top w12: U4.18@2911,1788 2963,1788 2975,1800 2975,1913 2963,1925 2946,1943 2946,1975 2946,2029 C28.1@2950,2033
  Top w16: 2913,1975 R10.1@2946,1975
N$25: C17.2 U4.2 | length 204.5
  Top w12: U4.2@3140,1660 3178,1660
  Top w16: 3178,1660 3225,1613 3225,1538 C17.2
N$26: C26.2 C27.2 R10.2 U4.3 | length 484.6
  Top w12: C27.2 C26.2 3005,2029 R10.2 3005,1946 3075,1875 3075,1700 3088,1688 3090,1686 U4.3@3140,1686
N$27: C18.1 C19.1 L5.P$1 R6.2 U4.21 | length 344.6
  Top w12: L5.P$1@2750,1655 2758,1663 2800,1663 2849,1712 U4.21@2911,1712
  Top w24: R6.2 2755,1505 2755,1550 2755,1600 2755,1655 L5.P$1@2750,1655
N$28: C2.2 U1.2 | length 61
  Top w12: U1.2@2235,1750 C2.2@2296,1750
N$29: C11.2 C14.1 L2.1 | length 133
  Top w24: L2.1@2555,1750 2596,1750 2575,1750 C11.2@2575,1821
N$30: C3.1 L1.P$2 U1.7 | length 238
  Top w12: L1.P$2@2063,1746 2068,1750 U1.7@2166,1750
  Top w24: C3.1@1930,1750 2050,1750 L1.P$2@2063,1746
N$31: R31.1 X8.10 | length 70
  Top w12: R31.1@3150,4080 X8.10
N$32: R34.2 U9.5 | length 86.2
  Top w16: R34.2@3400,3571 3448,3571 U9.5@3475,3598
N$33: C33.1 R29.1 R30.2 U7.3 | length 194.8
  Top w16: U7.3@1913,2622 1913,2588 1925,2575 1925,2530 R29.1@1930,2525 ; C33.1@1930,2475 R29.1@1930,2525 ; R30.2@1971,2525 1963,2525 R29.1@1930,2525
N$34: C3.2 F1.1 | length 55
  Top w24: F1.1@1816,1750 C3.2@1871,1750
N$35: C4.1 F1.3 | length 55
  Top w24: C4.1@1630,1750 F1.3@1685,1750
N$36: C12.2 L2.2 L3.1 | length 112
  Top w24: L3.1@2455,1750 2475,1750 ; C12.2@2475,1821 2475,1750 ; L2.2@2496,1750 2475,1750
N$37: C4.2 X4.1 | length 221
  Top w24: X4.1 C4.2@1571,1750
N$38: C16.2 C21.1 R7.2 U3.2 | length 414.2
  Top w10: R7.2 3428,1900 3445,1883 C16.2@3445,1794 ; 3388,1750 3427,1750 3445,1769 C16.2@3445,1794 ; C16.2@3446,1800 C16.2 C16.2@3445,1794
  Top w12: C21.1@3355,1750 3388,1750 ; R7.2 R7.2@3363,1900 ; U3.2@3359,1825 3400,1825 3421,1825 3438,1825 ; C16.2@3446,1796 C16.2@3446,1800
  Top w16: C16.2@3445,1794 3446,1794 C16.2@3446,1800
N$39: R19.2 U6.15 | length 1351.1
  Top w12: v1(2800,3700) R19.2@2800,3746 ; v1(2988,3513) 2988,3425 3013,3400 3013,2650 3042,2622 U6.15@3139,2622
  Bottom w12: v1(2800,3700) 2800,3650 2938,3513 v1(2988,3513)
N$40: C40.2 R33.1 | length 82
  Top w32: R33.1@3388,3146 3388,3138 C40.2@3462,3138
N$41: R28.1 U6.24 | length 222.6
  Top w12: U6.24@3139,2852 3177,2852 3275,2950 R28.1@3321,2950
N$42: R27.1 U6.23 | length 212.2
  Top w12: U6.23@3139,2827 3202,2827 3275,2900 R27.1@3321,2900
N$43: R26.1 U6.22 | length 202.3
  Top w12: U6.22 3226,2801 3275,2850 R26.1@3321,2850
N$44: R25.1 U6.21 | length 192.4
  Top w12: U6.21 3250,2775 3275,2800 R25.1@3321,2800
N$45: R24.1 U6.20 | length 182
  Top w12: U6.20@3139,2750 3320,2750 R24.1@3321,2750
N$46: R23.1 U6.19 | length 192.2
  Top w12: U6.19 3252,2724 3275,2700 R23.1@3321,2700
N$47: R22.1 U6.18 | length 202.6
  Top w12: U6.18@3139,2699 3227,2699 3275,2650 R22.1@3321,2650
N$48: 
N$49: 
N$50: 
N$51: 
N$58:  | length 75
  Top w10: 1063,4207 1063,4282
N$59:  | length 212.3
  Top w10: 1038,4325 1019,4288 1063,4288 ; 1082,4325 1063,4288 ; 1125,4325 1107,4288 1063,4288
N$69: C16.1 TCXO1.3 | length 70.6
  Top w12: C16.1@3505,1800 3565,1800 TCXO1.3@3572,1808
N$666: C38.1 C39.1 U9.6 U9.7 U10.3 | length 401.9
  Top w24: U10.3 3527,3320 3527,3413 3530,3416 3530,3500 3530,3525 3530,3594 U9.6@3525,3598
  Top w27: 3530,3525 3575,3525 U9.7@3575,3598
OBC_-FAULT: X2.34
OBC_OFF: X2.26
OSC1: C21.2 U4.8 | length 182.5
  Top w12: U4.8@3140,1814 3200,1814 3207,1813 3269,1750 C21.2@3296,1750
OSC2: R7.1 U3.4 U4.9 | length 207.3
  Top w10: U4.9@3140,1839 3208,1839 3219,1850 3226,1851 U3.4@3292,1851
  Top w12: U3.4@3292,1851 3296,1855 R7.1@3296,1900
PA_-FAULT: R5.1 U2.8 U6.3 | length 1945.2
  Top w12: U6.3@2911,2903 2941,2903 2963,2925 2963,3113 2963,3175 ; R5.1@2930,3175 2963,3175 ; v1(2938,3563) 2913,3538 2913,3338 2963,3288 2963,3175 ; v1(3975,3488) U2.8@3975,3598 ; U2.8@3975,3598 3975,3600 U2.8@3975,3598
  Bottom w12: v1(2938,3563) 3900,3563 v1(3975,3488)
PA_ON: R2.2 TR1.1 U6.17 | length 206.8
  Top w12: U6.17@3139,2673 3178,2673 3213,2638 R2.2 3262,2580 TR1.1@3270,2588
PANELTEMP_SCL: X2.29
PANELTEMP_SDA: X2.31
RESETBEACON: R31.2 R36.1 U6.7 U8.4 | length 2490.2
  Top w10: 2375,2825 2400,2850
  Top w12: U8.4@2327,2863 2393,2863 2400,2871 2400,2850 ; v1(2363,2838) v1@2369,2832 ; v1(2538,3163) 2775,3163 2800,3188 2800,3263 2825,3288 2850,3288 2863,3300 2863,3625 2900,3663 2988,3663 3000,3675 v1(3000,3800) ; U6.7@2911,2801 2801,2801 2725,2725 2475,2725 2375,2825 ; v1(3125,3963) 3150,3988 R31.2@3150,4021 ; v1@2369,2832 2375,2825 ; v1@2369,2832 2375,2825
  Bottom w12: v1(2363,2838) 2363,3000 2525,3163 v1(2538,3163) ; v1(3000,3800) 3125,3925 v1(3125,3963)
RXD: R20.1 X7.3 | length 145
  Top w16: R20.1@2700,3805 X7.3
SC_-ON: X2.40
SC_-PFO: X2.48
SCCHG_EN: X2.21
SCOUT_-PG: X2.50
SCOUT_EN: X2.22
SOLAR_-ON: X2.36
SOLAR_CS1: X2.15
SOLAR_CS2: X2.14
SOLAR_CS3: X2.17
SOLAR_CS4: X2.16
SOLAR_CS5: X2.18
STRUT_GND: C1.1 H4.B3,2 R1.P$2 | length 229
  Top w40: C1.1@1250,4113 1250,4225 ; R1.P$2 1350,4238
SUPERCAP_TEMP: X2.49
TEST: R32.1 U6.1 X8.8 | length 1801.1
  Top w12: U6.1@2911,2954 2884,2954 2875,2963 2875,2975 2888,2988 2913,2988 2925,3000 2925,3033 2930,3038 2930,3083 2900,3113 2838,3113 2825,3125 2825,3250 2838,3263 2875,3263 2888,3275 2888,3613 2913,3638 3019,3638 3032,3650 v1(3032,4213)
  Bottom w12: v1(3032,4213) 3188,4213 3200,4200 X8.8
TXD: R19.1 X7.2 | length 145
  Top w16: R19.1@2800,3805 X7.2
VBAT: X2.11 X2.12 | length 100
  Top w28: X2.11 X2.12
VBEACON_PA: C5.1 C6.1 C7.1 C8.P$1 C10.1 L1.P$1 U2.6 U2.7 | length 4738.2
  Top w24: C8.P$1 2063,1475 2055,1475 2055,1550 2055,1600 2055,1647 2063,1655 L1.P$1@2063,1663
  Top w27: U2.6@3875,3598 3880,3594 3880,3525 ; C10.1@3880,3500 3880,3525 ; U2.7@3925,3598 3925,3525 3880,3525
  Top w40: C8.P$1 2188,1250 3700,1250 4000,1550 4000,2850 3750,3100 3750,3300 3880,3430 C10.1@3880,3500
VBUS: R4.2 R21.1 U2.1 U2.2 U9.1 U9.2 X2.7 X2.8 X2.9 X2.10 X3.1 | length 4826.4
  Top w16: R21.1@2030,2825 2063,2825 2088,2800 2088,2563 2163,2488 2600,2488 2713,2375 3450,2375 3463,2375 3500,2413 3500,2575 v1(3463,2613) ; R4.2 3950,3950 3950,4038
  Top w50: 3588,3938 3700,4038 3950,4038 4063,4038 4075,4038 4125,4000 4127,3762 X2.7
  Bottom w16: v1(3463,2613) 3463,2625 3563,2725 4125,2725 4163,2763 4163,3613 4213,3663 4256,3663 X2.9
VCCRF: C15.1 C20.1 C22.1 C24.1 C43.1 L6.2 R6.1 TCXO1.4 U3.5 U4.1 | length 3432.4
  Top w10: v1(3250,1813) 3264,1800 U3.5@3292,1800 ; v1(3350,1700) 3488,1563 v3(3538,1563)
  Top w12: U4.1@3140,1635 3166,1635 3175,1625 ; TCXO1.4@3572,1643 3572,1599 C15.1@3608,1575
  Top w16: C22.1@3125,1505 3175,1555 3175,1625
  Top w24: R6.1@2750,1446 2755,1446 2755,1400 3000,1400 ; C22.1@3125,1505 3075,1505 3055,1505 3025,1475 3025,1425 3000,1400 ; v3(3538,1563) 3588,1563 3600,1575 C15.1@3608,1575 ; v3(3613,1400) 3763,1400 ; 3925,1950 3925,1825 3925,1725 3925,1563 3763,1400 ; 3000,1400 3050,1350 3713,1350 3763,1400
  Top w28: C43.1@3905,2088 3913,2096 C43.1@3913,2101 ; 3913,2113 3925,2101 3925,2000 3925,1950
  Top w32: C43.1@3913,2100 3913,2101 3913,2113 L6.2@3913,2264
  Bottom w10: v1(3250,1813) 3313,1813 3325,1800 3325,1725 v1(3350,1700)
  Bottom w24: v3(3538,1563) 3613,1488 v3(3613,1400)
VSOLAR: X2.3 X2.4 X2.5 X2.6
VSUPERCAP: X2.13
pads on no net: H1.B3,2 H2.B3,2 H3.B3,2 U3.1 U4.10 U5.3 X8.2 X8.6
copper on no net: | length 39.3
  Top w12: 3421,1825 cw(c3421,1800) 3446,1800

## Polygon pours and split planes (outlines as drawn)
VSOLAR on Top "Top-VSOLAR" (solid, remove dead copper, pour order 2): 4220,3993 4220,3833 4393,3833 4393,3993
GND on Top "Top-GND" (solid, remove dead copper, pour order 6): 3645,1545 3645,1680 3695,1680 3695,1770 3645,1770 3645,1858 3505,1858 3505,1833 3333,1833 3333,1990.07 3360.93,2018 3652.07,2018 3793,1877.07 3793,1622.93 3715.07,1545
GND on Top "Top-GND 1" (solid, remove dead copper, pour order 8): 3045,1455 3260.81,1455 3270,1464.95 3270,1555 3315.07,1555 3430,1440.07 3430,1397.93 3415.07,1383 3061.05,1383 3045,1397.81
GND on Top "Top-GND 2" (solid, remove dead copper, pour order 10): 2798,1436 2798,1613.49 2811.79,1640 2827,1640 2827,1527 2990,1527 2990,1449.12 2975.78,1436
GND on Top "Top-GND 3" (solid, remove dead copper, pour order 12): 2920,2095 3018,2095 3018,2183 3083,2183 3083,2005 3033,2005 3033,1961.05 3047.81,1945 3165.07,1945 3293,2072.93 3293,2102.07 3140.07,2255 2997.93,2255 2920,2177.07
GND on Top "Top-GND 4" (solid, remove dead copper, pour order 14): 995,2255 2900.17,2255 2805,2160.91 2805,1958 2730,1958 2730,1795 2672.14,1795 2635.14,1858 2355,1858 2355,1833 1268,1833 1268,1668 2005,1668 2005,1302.07 2102.07,1205 3722.93,1205 4045,1527.07 4045,2255 4126.07,2255 4168,2213.07 4168,995 1495,995 1495,1495 995,1495
GND on Top "Top-GND 5" (solid, remove dead copper, pour order 16): 2133,1668 2705,1668 2705,1368 2990.07,1368 3043,1315.07 3043,1295 2210.93,1295 2108,1397.93 2108,1615.07 2133,1640.07
GND on Top "Top-GND 6" (solid, remove dead copper, pour order 18): 3830,3980 3830,3683 3780,3683 3780,3608 3718,3608 3718,3530 3843,3530 3843,3447.93 3765.07,3370 3660.93,3370 3633,3397.93 3633,3477.03 3670,3515.03 3670,3755 3733,3755 3733,3980
GND on Top "Top-GND 7" (solid, remove dead copper, pour order 22): 3468,3980 3468,3843 3493,3843 3493,3683 3430,3683 3430,3608 3368,3608 3368,3530 3480,3530 3480,3255 3505,3255 3505,3195 3355,3195 3355,3136.05 3340.19,3120 3295,3120 3295,3980
GND on Top "Top-GND 8" (solid, remove dead copper, pour order 24): 3855,2020 3855,2718 3733,2718 3733,2085.95 3797.91,2020
GND on Top "Top-GND 9" (solid, remove dead copper, pour order 26): 2568,2760.93 2568,2910.93 2590.07,2933 2730,2933 2730,2952.05 2640.09,3043 2522.91,3043 2458,2977.05 2458,2772.93 2485.93,2745 2552.07,2745
GND on Top "Top-GND 10" (solid, remove dead copper, pour order 28): 2995,2555 2995,2495 3168,2495 3168,2555
GND on Top "Top-GND 11" (solid, remove dead copper, pour order 30): 2380,3593 2245,3593 2245,3495 2380,3495
GND on Top "Top-GND 12" (solid, remove dead copper, pour order 32): 2470,3830 2470,3670 2530,3670 2530,3830
GND on Top "Top-GND 13" (solid, remove dead copper, pour order 34): 2230,2920 2230,3018 2095,3018 2095,2920
GND on Top "Top-GND 14" (solid, remove dead copper, pour order 36): 2380,2745 2295,2745 2295,2793 2380,2793
GND on Top "Top-GND 15" (solid, remove dead copper, pour order 38): 3237.93,2255 3347.93,2145 3555,2145 3555,2255
GND on Top "Top-GND 16" (solid, remove dead copper, pour order 40): 1893,2345 1893,2555 1830,2555 1830,2655 1768,2655 1768,2795 1893,2795 1893,3018 1670,3018 1670,2345
GND on Top "Top-GND 17" (solid, remove dead copper, pour order 42): 1958,2618 1958,2558 2043,2558 2043,2618
GND on Top "Top-GND 18" (solid, remove dead copper, pour order 46): 1145,4055 1145,3895 1455,3895 1455,4055
GND on Top "Top-GND 19" (solid, remove dead copper, pour order 48): 2133,1718 2133,1645 2180,1645 2180,1718
GND on Top "Top-GND 20" (solid, remove dead copper, pour order 50): 4220,4105 4220,4020 4458,4020 4458,3933 4543,3933 4543,4105
VBUS on Top "Top-VBUS" (solid, remove dead copper, pour order 52): 4195,3805 4543,3805 4543,3620 4195,3620
VBUS on Top "Top-VBUS 1" (solid, remove dead copper, pour order 54): 3908,3795 3908,4055 3975.77,4055 4018,4041.66 4018,3795
VBUS on Top "Top-VBUS 2" (solid, remove dead copper, pour order 56): 3558,3795 3558,3940.23 3686.09,4055 3705,4055 3705,3795
N$23 on Top "Top-N$23" (solid, remove dead copper, pour order 58): 2786,1765 2813.83,1765 2840.83,1738 2832.83,1730 2786,1730
STRUT_GND on Top "Top-STRUT_GND" (solid, remove dead copper, pour order 60): 1145,4480 1145,4145 2955,4145 2955,4405 1480,4405 1480,4480
GND on Bottom "Bottom-GND" (solid, remove dead copper, pour order 4): 995,2255 995,1495 1495,1495 1495,995 4155,995 4155,2213.07 4113.07,2255
GND on Bottom "Bottom-GND 1" (solid, remove dead copper, pour order 20): 995,4605 995,2345 4200,2345 4605,2345 4605,4605
GND on Bottom "Bottom-GND 2" (solid, remove dead copper, pour order 44): 4208,1605 4208,1508 4630,1508 4630,2405 4358,2405 4358,1605

## Keep-outs
Keep-Out Layer:
  lines w0: 1000,1119 ccw(c1119,1119) 1119,1000 4504,1000 ccw(c4504,1119) 4623,1119 4623,2418 4623,2457 ccw(c4583,2457) 4583,2497 4544,2497 cw(c4543.5,2575.5) 4465,2575 4465,3048 cw(c4543.5,3047.5) 4544,3126 4583,3126 ccw(c4583,3166) 4623,3166 4623,3205 4623,4504 ccw(c4504,4504) 4504,4623 4150,4623 ccw(c4150.5,4583.5) 4111,4583 4111,4544 cw(c3993,4544) 3993,4426 1630,4426 cw(c1630,4544) 1512,4544 1512,4583 ccw(c1472.5,4583.5) 1473,4623 1119,4623 ccw(c1119,4504) 1000,4504 1000,1119

## Other copper
Top:
  text "SW" at 2425,4238 h42.5 r90
  text "RXD" at 2725,4238 h42.5 r90
  text "TXD" at 2825,4238 h42.5 r90
  text "GND" at 2925,4238 h42.5 r90
  text "GND" at 4525,4150 h42.5 r90
  text "144MHz/146MHz" at 1150,3800 h59.5 r270
  text "CW Beacon" at 1250,3800 h59.5 r270
  text "GODTX_2" at 1350,3800 h59.5 r270
  text "G.O.D.Sat" at 1450,3800 h59.5 r270
  text "OSSI-1" at 1550,3800 h59.5 r270
  text "GND" at 1825,3638 h42.5 r90
  text "VBUS" at 4525,3425 h42.5 r90
  text "GND" at 2150,3375 h42.5 r90
  text "P3.0" at 2150,3175 h42.5 r90
  text "GND" at 4525,1875 h42.5 r90
  text "SCL" at 4525,1700 h42.5 r90
  text "SDA" at 4525,1513 h42.5 r90
Bottom:
  pour cut-out net N$48: 1000,1000 1010,1000 1010,1010 1000,1010
  pour cut-out net N$49: 1000,1000 1010,1000 1010,1010 1000,1010
  pour cut-out net N$50: 1000,1000 1010,1000 1010,1010 1000,1010
  pour cut-out net N$51: 1000,1000 1010,1000 1010,1010 1000,1010

## Silkscreen, mask and mechanical layers (free items; w line width, h text height)
Top Solder:
  text "SW" at 2425,4238 h42.5 r90
  text "RXD" at 2725,4238 h42.5 r90
  text "TXD" at 2825,4238 h42.5 r90
  text "GND" at 2925,4238 h42.5 r90
  text "GND" at 4525,4150 h42.5 r90
  text "144MHz/146MHz" at 1150,3800 h59.5 r270
  text "CW Beacon" at 1250,3800 h59.5 r270
  text "GODTX_2" at 1350,3800 h59.5 r270
  text "G.O.D.Sat" at 1450,3800 h59.5 r270
  text "OSSI-1" at 1550,3800 h59.5 r270
  text "GND" at 1825,3638 h42.5 r90
  text "VBUS" at 4525,3425 h42.5 r90
  text "GND" at 2150,3375 h42.5 r90
  text "P3.0" at 2150,3175 h42.5 r90
  text "GND" at 4525,1875 h42.5 r90
  text "SCL" at 4525,1700 h42.5 r90
  text "SDA" at 4525,1513 h42.5 r90
Dimension:
  lines w0: 1000,1119 ccw(c1119,1119) 1119,1000 4504,1000 ccw(c4504,1119) 4623,1119 4623,2418 4623,2457 ccw(c4583,2457) 4583,2497 4544,2497 cw(c4543.5,2575.5) 4465,2575 4465,3048 cw(c4543.5,3047.5) 4544,3126 4583,3126 ccw(c4583,3166) 4623,3166 4623,3205 4623,4504 ccw(c4504,4504) 4504,4623 4150,4623 ccw(c4150.5,4583.5) 4111,4583 4111,4544 cw(c3993,4544) 3993,4426 1630,4426 cw(c1630,4544) 1512,4544 1512,4583 ccw(c1472.5,4583.5) 1473,4623 1119,4623 ccw(c1119,4504) 1000,4504 1000,1119

## Text inside footprints (layer, text, board x,y; h text height)
C1: tNames ">NAME" at 1290,4110 h77.5 r270; tValues ">VALUE" at 1160,4110 h77.5 r270
C2: tNames ">NAME" at 2360,1715 h77.5 r180; tValues ">VALUE" at 2360,1830 h77.5 r180
C3: tNames ">NAME" at 1935,1715 h77.5 r180; tValues ">VALUE" at 1935,1830 h77.5 r180
C4: tNames ">NAME" at 1635,1715 h77.5 r180; tValues ">VALUE" at 1635,1830 h77.5 r180
C5: tNames ">NAME" at 2060,1565 h77.5 r180; tValues ">VALUE" at 2060,1680 h77.5 r180
C6: tNames ">NAME" at 2060,1515 h77.5 r180; tValues ">VALUE" at 2060,1630 h77.5 r180
C7: tNames ">NAME" at 2060,1435 h77.5 r180; tValues ">VALUE" at 2060,1565 h77.5 r180
C8: tNames ">NAME" at 2125,1300 h77.5 r180; tValues ">VALUE" at 2125,1500 h77.5 r180
C9: tNames ">NAME" at 3873,3865 h77.5 r180; tValues ">VALUE" at 3873,3980 h77.5 r180
C10: tNames ">NAME" at 3885,3465 h77.5 r180; tValues ">VALUE" at 3885,3580 h77.5 r180
C11: tNames ">NAME" at 2610,1885 h77.5 r270; tValues ">VALUE" at 2495,1885 h77.5 r270
C12: tNames ">NAME" at 2510,1885 h77.5 r270; tValues ">VALUE" at 2395,1885 h77.5 r270
C13: tNames ">NAME" at 2410,1885 h77.5 r270; tValues ">VALUE" at 2295,1885 h77.5 r270
C14: tNames ">NAME" at 2590,1785 h77.5; tValues ">VALUE" at 2590,1670 h77.5
C15: tNames ">NAME" at 3603,1610 h77.5; tValues ">VALUE" at 3603,1495 h77.5
C16: tNames ">NAME" at 3510,1765 h77.5 r180; tValues ">VALUE" at 3510,1880 h77.5 r180
C17: tNames ">NAME" at 3185,1440 h77.5 r90; tValues ">VALUE" at 3315,1440 h77.5 r90
C18: tNames ">NAME" at 2760,1565 h77.5 r180; tValues ">VALUE" at 2760,1680 h77.5 r180
C19: tNames ">NAME" at 2760,1515 h77.5 r180; tValues ">VALUE" at 2760,1630 h77.5 r180
C20: tNames ">NAME" at 2760,1365 h77.5 r180; tValues ">VALUE" at 2760,1480 h77.5 r180
C21: tNames ">NAME" at 3360,1715 h77.5 r180; tValues ">VALUE" at 3360,1830 h77.5 r180
C22: tNames ">NAME" at 3160,1510 h77.5 r270; tValues ">VALUE" at 3045,1510 h77.5 r270
C23: tNames ">NAME" at 2885,1515 h77.5 r90; tValues ">VALUE" at 3015,1515 h77.5 r90
C24: tNames ">NAME" at 3110,1510 h77.5 r270; tValues ">VALUE" at 2995,1510 h77.5 r270
C25: bNames ">NAME" at 3060,1640 h77.5 r270; bValues ">VALUE" at 2945,1640 h77.5 r270
C26: tNames ">NAME" at 3035,2098 h77.5 r270; tValues ">VALUE" at 2920,2098 h77.5 r270
C27: tNames ">NAME" at 3085,2098 h77.5 r270; tValues ">VALUE" at 2970,2098 h77.5 r270
C28: tNames ">NAME" at 2915,2028 h77.5 r90; tValues ">VALUE" at 3030,2028 h77.5 r90
C29: tNames ">NAME" at 2415,3785 h77.5; tValues ">VALUE" at 2415,3670 h77.5
C30: tNames ">NAME" at 1935,2840 h77.5 r180; tValues ">VALUE" at 1935,2955 h77.5 r180
C31: tNames ">NAME" at 2128,2865 h77.5 r90; tValues ">VALUE" at 2243,2865 h77.5 r90
C32: tNames ">NAME" at 2623,2753 h77.5 r180; tValues ">VALUE" at 2623,2868 h77.5 r180
C33: tNames ">NAME" at 1935,2440 h77.5 r180; tValues ">VALUE" at 1935,2555 h77.5 r180
C34: tNames ">NAME" at 2623,2853 h77.5 r180; tValues ">VALUE" at 2623,2968 h77.5 r180
C35: tNames ">NAME" at 2778,2978 h77.5 r90; tValues ">VALUE" at 2893,2978 h77.5 r90
C36: tNames ">NAME" at 1835,2710 h77.5 r270; tValues ">VALUE" at 1720,2710 h77.5 r270
C37: tNames ">NAME" at 3510,3915 h77.5 r180; tValues ">VALUE" at 3510,4030 h77.5 r180
C38: tNames ">NAME" at 3535,3465 h77.5 r180; tValues ">VALUE" at 3535,3580 h77.5 r180
C39: tNames ">NAME" at 3585,3373 h77.5 r180; tValues ">VALUE" at 3585,3503 h77.5 r180; Top Overlay "+" at 3600,3438 h77.5 r180
C40: tNames ">NAME" at 3623,3098 h77.5 r180; tValues ">VALUE" at 3623,3228 h77.5 r180; Top Overlay "+" at 3638,3163 h77.5 r180
C41: tNames ">NAME" at 3910,2590 h77.5 r180; tValues ">VALUE" at 3910,2705 h77.5 r180
C42: tNames ">NAME" at 3975,2450 h77.5 r180; tValues ">VALUE" at 3975,2650 h77.5 r180
C43: tNames ">NAME" at 3910,2053 h77.5 r180; tValues ">VALUE" at 3910,2168 h77.5 r180
D1: tNames ">NAME" at 2325,3675 h77.5; tValues ">VALUE" at 2325,3475 h77.5
F1: tNames ">NAME" at 1946.85,1907.48 h108.5 r180; tValues ">VALUE" at 1946.85,1986.22 h108.5 r180
JP1: tNames ">NAME" at 2390,3413 h77.5 r270; tValues ">VALUE" at 2210,3413 h77.5 r270
L1: tNames ">NAME" at 2138,1825 h77.5 r270; tValues ">VALUE" at 1938,1825 h77.5 r270
L2: tNames ">NAME" at 2560,1715 h77.5 r180; tValues ">VALUE" at 2560,1830 h77.5 r180
L3: tNames ">NAME" at 2460,1715 h77.5 r180; tValues ">VALUE" at 2460,1830 h77.5 r180
L4: tNames ">NAME" at 2740,1865 h77.5 r90; tValues ">VALUE" at 2855,1865 h77.5 r90
L5: tNames ">NAME" at 2825,1825 h77.5 r270; tValues ">VALUE" at 2625,1825 h77.5 r270
L6: tNames ">NAME" at 3953,2336 h77.5 r270; tValues ">VALUE" at 3823,2336 h77.5 r270
LED1: tNames ">NAME" at 2185.5,3278 h24.8 r90; tValues ">VALUE" at 2256,3273 h24.8 r90
Q1: tNames ">NAME" at 2538,2738 h108.5 r90; tValues ">VALUE" at 2613,2738 h108.5 r90
R1: tNames ">NAME" at 1300,3950 h77.5 r90; tValues ">VALUE" at 1450,3925 h77.5 r90
R2: tNames ">NAME" at 3178,2515 h77.5 r90; tValues ">VALUE" at 3293,2515 h77.5 r90
R3: tNames ">NAME" at 3785,3635 h77.5 r270; tValues ">VALUE" at 3670,3635 h77.5 r270
R4: tNames ">NAME" at 3865,3985 h77.5; tValues ">VALUE" at 3865,3870 h77.5
R5: tNames ">NAME" at 2935,3140 h77.5 r180; tValues ">VALUE" at 2935,3255 h77.5 r180
R6: tNames ">NAME" at 2715,1440 h77.5 r90; tValues ">VALUE" at 2830,1440 h77.5 r90
R7: tNames ">NAME" at 3290,1935 h77.5; tValues ">VALUE" at 3290,1820 h77.5
R8: tNames ">NAME" at 2828,1515 h77.5 r90; tValues ">VALUE" at 2943,1515 h77.5 r90
R9: tNames ">NAME" at 3015,2128 h77.5 r90; tValues ">VALUE" at 3130,2128 h77.5 r90
R10: tNames ">NAME" at 2940,2010 h77.5; tValues ">VALUE" at 2940,1895 h77.5
R11: tNames ">NAME" at 2415,3835 h77.5; tValues ">VALUE" at 2415,3720 h77.5
R12: tNames ">NAME" at 2315,3740 h77.5 r90; tValues ">VALUE" at 2430,3740 h77.5 r90
R13: tNames ">NAME" at 2790,2503 h77.5 r90; tValues ">VALUE" at 2905,2503 h77.5 r90
R14: tNames ">NAME" at 2840,2503 h77.5 r90; tValues ">VALUE" at 2955,2503 h77.5 r90
R15: tNames ">NAME" at 2178,3128 h77.5 r90; tValues ">VALUE" at 2293,3128 h77.5 r90
R16: tNames ">NAME" at 2740,2453 h77.5 r90; tValues ">VALUE" at 2855,2453 h77.5 r90
R17: tNames ">NAME" at 1935,2790 h77.5 r180; tValues ">VALUE" at 1935,2905 h77.5 r180
R18: tNames ">NAME" at 2690,2453 h77.5 r90; tValues ">VALUE" at 2805,2453 h77.5 r90
R19: tNames ">NAME" at 2835,3810 h77.5 r270; tValues ">VALUE" at 2720,3810 h77.5 r270
R20: tNames ">NAME" at 2735,3810 h77.5 r270; tValues ">VALUE" at 2620,3810 h77.5 r270
R21: tNames ">NAME" at 2035,2790 h77.5 r180; tValues ">VALUE" at 2035,2905 h77.5 r180
R22: tNames ">NAME" at 3315,2685 h77.5; tValues ">VALUE" at 3315,2570 h77.5
R23: tNames ">NAME" at 3315,2735 h77.5; tValues ">VALUE" at 3315,2620 h77.5
R24: tNames ">NAME" at 3315,2785 h77.5; tValues ">VALUE" at 3315,2670 h77.5
R25: tNames ">NAME" at 3315,2835 h77.5; tValues ">VALUE" at 3315,2720 h77.5
R26: tNames ">NAME" at 3315,2885 h77.5; tValues ">VALUE" at 3315,2770 h77.5
R27: tNames ">NAME" at 3315,2935 h77.5; tValues ">VALUE" at 3315,2820 h77.5
R28: tNames ">NAME" at 3315,2985 h77.5; tValues ">VALUE" at 3315,2870 h77.5
R29: tNames ">NAME" at 1935,2490 h77.5 r180; tValues ">VALUE" at 1935,2605 h77.5 r180
R30: tNames ">NAME" at 2035,2490 h77.5 r180; tValues ">VALUE" at 2035,2605 h77.5 r180
R31: tNames ">NAME" at 3185,4085 h77.5 r270; tValues ">VALUE" at 3070,4085 h77.5 r270
R32: tNames ">NAME" at 2935,3003 h77.5 r180; tValues ">VALUE" at 2935,3118 h77.5 r180
R33: tNames ">NAME" at 3353,3140 h77.5 r90; tValues ">VALUE" at 3468,3140 h77.5 r90
R34: tNames ">NAME" at 3435,3635 h77.5 r270; tValues ">VALUE" at 3320,3635 h77.5 r270
R35: tNames ">NAME" at 3440,3935 h77.5; tValues ">VALUE" at 3440,3820 h77.5
R36: tNames ">NAME" at 2365,2865 h77.5 r90; tValues ">VALUE" at 2480,2865 h77.5 r90
TCXO1: tNames ">NAME" at 3825,1595 h77.5 r90; tValues ">VALUE" at 3875,1595 h77.5 r90
TP1: tNames ">NAME" at 1760,3600 h77.5; tValues ">VALUE" at 1800,3550 h1.55; tTest ">TP_SIGNAL_NAME" at 1750,3450 h62
TR1: tNames ">NAME" at 3388,2625 h77.5 r270; tValues ">VALUE" at 3188,2625 h77.5 r270
U1: tNames ">NAME" at 2250.3,1694 h77.5 r180; tValues ">VALUE" at 2249.32,1881.22 h77.5 r180
U2: tNames ">NAME" at 4025,3775 h77.5 r270; tValues ">VALUE" at 3737,3787.5 h77.5 r270
U3: tNames ">NAME" at 3452.95,1773.82 h77.5 r180; tValues ">VALUE" at 3478.54,1928 h77.5 r180
U4: tNames ">NAME" at 3107,1609.82 h62 r180; tValues ">VALUE" at 3107,1980 h62 r180
U5: tNames ">NAME" at 2350,2600 h77.5 r180; tValues ">VALUE" at 2350,2800 h77.5 r180
U6: tNames ">NAME" at 3051,2899.38 h77.5 r270; tValues ">VALUE" at 2961.69,2905.29 h77.5 r270
U7: tNames ">NAME" at 1825,2600 h77.5 r90; tValues ">VALUE" at 2025,2600 h77.5 r90
U8: tNames ">NAME" at 2350,2975 h77.5 r270; tValues ">VALUE" at 2140,2975 h77.5 r270
U9: tNames ">NAME" at 3675,3775 h77.5 r270; tValues ">VALUE" at 3387,3787.5 h77.5 r270
U10: tNames ">NAME" at 3450,3350 h77.5; tValues ">VALUE" at 3450,3150 h77.5
X1: tNames ">NAME" at 4450,3913 h77.5 r90; tValues ">VALUE" at 4600,3913 h77.5 r90
X2: tNames ">NAME" at 4133,4262 h108.5; tValues ">VALUE" at 4133,4187 h108.5
X3: tNames ">NAME" at 4450,3613 h77.5 r90; tValues ">VALUE" at 4600,3613 h77.5 r90
X4: tNames ">NAME" at 1175,1650 h77.5 r90; tValues ">VALUE" at 1575,1625 h77.5 r90
X5: tNames ">NAME" at 2252.36,4295 h77.5; tValues ">VALUE" at 2252.36,4233 h77.5; Top Overlay "1" at 2450,4049 h77.5
X6: tNames ">NAME" at 4428,2072 h77.5 r90; tValues ">VALUE" at 4625,2075 h77.5 r90
X7: tNames ">NAME" at 2603.94,4295 h77.5; tValues ">VALUE" at 2603.94,4233 h77.5; Top Overlay "1" at 2900,4049 h77.5
X8: tNames ">NAME" at 3400,4100 h77.5 r180; tValues ">VALUE" at 3400,4450 h77.5 r180